# Altium PCB PCB.PcbDoc (part 3 of 3)
Units mm, origin at the board's own origin, x right, y up, seen from the top; angles counter-clockwise.
Board outline 68.53 x 53.3 mm, 2 copper layers (Top Layer, Bottom Layer); 60 components, 48 nets, 220 pads, 55 vias.
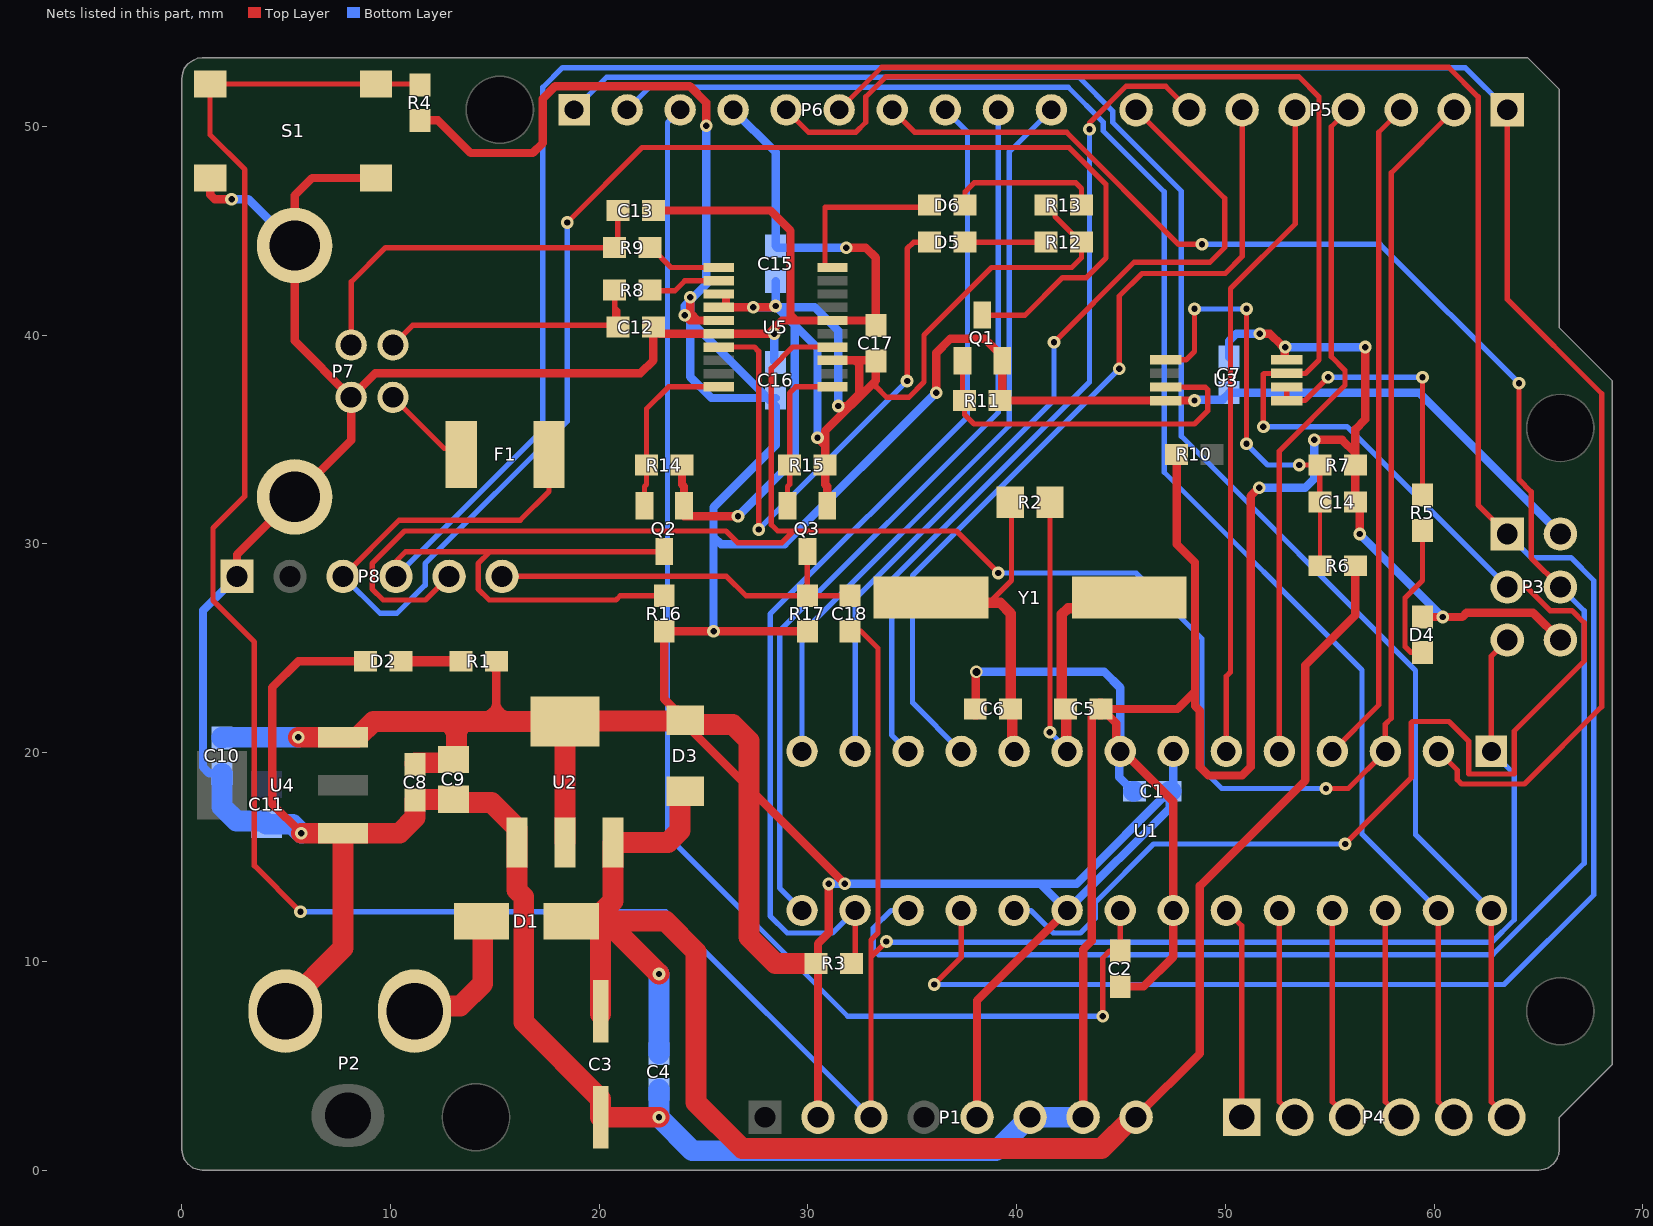
[diagram p2: the nets of this part, all layers, seen from the top]

## Via types
v1: diameter 0.61, hole 0.305, Top Layer to Bottom Layer, 54 vias
v2: diameter 0.61, hole 0.381, Top Layer to Bottom Layer, 1 vias

## Nets (pads, with @x,y where several pads share a name; then routed paths per layer and width w, separated by ;. In a path a pad name is that pad's centre, name@x,y a point inside that pad or via, vN(x,y) a via of type N, cw(c..) or ccw(c..) an arc to the next point about the centre after c; other vN are vias at no path point) (continued)
+3V3E: C15.2 C17.2 Q2.1 Q3.1 R12.2 R13.2 R14.1 R15.2 U5.3 U5.13 U5.14 | length 69.5
  Top Layer w0.254: 33.25,37.83 33.25,37.536 33.758,37.028 34.833,37.028 35.56,37.755 35.56,40.016 38.788,43.244 42.637,43.244 43.106,43.712 R12.2@43.106,44.461 43.056,44.461 41.829,45.688 41.829,45.866 41.508,46.186 R13.2@41.406,46.186
  Top Layer w0.4: R14.1@23.966,33.782 23.966,32.849 24.064,32.751 Q2.1@24.064,31.834 24.064,31.329 v1(26.646,31.329) ; U5.14@25.723,41.339 U5.14@26.073,41.339 ; U5.13@25.723,41.974 26.073,41.974 U5.14@26.073,41.339 ; v1(27.382,41.339) U5.14@26.073,41.339 ; v1@28.448,41.339 U5.14@26.073,41.339 ; v1(30.456,35.088) 30.822,34.722 ; U5.3@30.823,38.799 U5.3@31.173,38.799 ; Q3.1@30.922,31.834 30.922,32.751 30.822,32.851 R15.2@30.822,33.782 30.822,34.722 ; v1(31.446,36.612) 31.878,36.612 32.462,37.196 32.462,38.595 32.259,38.799 U5.3@31.173,38.799 ; 30.822,34.722 30.822,35.403 33.25,37.83 C17.2@33.25,38.774 33.225,38.799 U5.3@31.173,38.799
  Bottom Layer w0.4: v1(26.646,31.329) 29.363,34.047 29.363,40.487 ; v1(27.382,41.339) 30.327,41.339 31.446,40.219 v1(31.446,36.612) ; C15.2@28.448,42.584 v1(28.448,41.402) 29.18,40.67 29.363,40.487 ; v1(30.456,35.088) 30.456,39.394 29.363,40.487
+5VD: C1.1 C7.1 C8.2 C9.2 C10.2 C16.1 D3.2 P1.2 P1.5 P3.2 Q1.2 R1.1 R3.1 R4.1 R11.2 R16.1 R17.2 U1.7 U1.20 U2.2 U3.8 U4.3 U5.15 | length 254.6
  Top Layer w0.381: 14.14,21.756 ccw(c14.309,22.521) 15.074,22.352 ccw(c15.839,22.521) 16.008,21.756
  Top Layer w0.4: R4.1@11.408,50.297 12.275,50.297 13.844,48.728 16.816,48.728 17.298,49.21 17.298,51.337 17.89,51.928 24.343,51.928 25.122,51.149 v1(25.122,50.038) ; 13.983,21.423 14.346,21.423 14.346,21.55 14.14,21.756 ; 14.986,21.494 15.074,21.582 15.074,22.352 R1.1@15.074,24.384 ; D3.2@23.73,21.756 23.961,21.525 24.13,21.356 v1(31.759,13.727) ; v1(24.093,40.958) 24.347,40.704 U5.15@25.723,40.704 ; D3.2@24.13,21.556 23.114,22.572 R16.1@23.114,25.82 v1(25.477,25.82) R17.2@29.972,25.82 ; v1(24.36,41.819) 24.36,41.057 24.713,40.704 U5.15@25.723,40.704 ; U5.15@26.073,40.704 U5.15@25.723,40.704 ; P1.2@30.48,2.54 30.48,10.854 30.989,11.363 v1(30.989,13.716) ; v1(36.144,37.25) 36.144,39.159 36.813,39.828 38.479,39.828 39.304,39.003 Q1.2@39.304,38.778 39.304,36.973 R11.2@39.202,36.871 42.571,36.871 U3.8@47.138,36.871 v1(48.514,36.871) ; P1.5@38.1,2.54 38.1,8.128 U1.20@42.418,12.446
  Top Layer w0.508: 12.365,21.336 cw(c12.279,20.661) 12.954,20.574 ; 13.394,20.661 cw(c14.069,20.747) 13.983,21.423
  Top Layer w1: v1(5.588,20.745) U4.3@7.731,20.745 8.431,20.745 9.18,21.494 14.986,21.494 U2.2@18.365,21.494 ; C8.2@11.176,19.444 11.176,19.494 11.203,19.521 12.865,19.521 C9.2@13.015,19.671 13.165,19.821 13.165,21.082 ; R1.1@15.024,24.334 15.024,24.384 R1.1@15.074,24.384 ; U2.2@18.365,15.694 U2.2@18.365,21.494 ; D3.2@23.73,21.756 D3.2@23.961,21.525 ; D3.2@24.13,21.556 24.099,21.525 D3.2@23.961,21.525 ; R3.1@30.392,9.906 28.448,9.906 27.178,11.176 27.178,20.574 26.396,21.356 24.13,21.356 D3.2@23.961,21.525 ; U2.2@18.365,21.494 18.396,21.525 D3.2@23.961,21.525
  Bottom Layer w0.4: v1(24.36,41.819) 24.36,38.009 25.373,36.996 C16.1@28.448,36.996 ; v1(25.122,50.038) 25.122,42.431 24.093,41.402 v1(24.093,40.958) 24.133,40.917 28.251,36.799 28.448,36.603 28.448,34.731 25.477,31.76 25.477,30.342 ; v1(25.477,25.82) 25.477,30.342 ; v1(30.989,13.716) 41.148,13.716 U1.20@42.418,12.446 47.332,17.36 C1.1@47.332,18.156 ; v1(31.759,13.727) 42.876,13.727 47.498,18.348 U1.7@47.498,20.066 47.498,18.272 C1.1@47.382,18.156 ; v1(36.144,37.25) 28.883,29.989 25.83,29.989 25.477,30.342 ; v1(48.514,36.871) 48.554,36.911 49.865,36.911 50.165,37.211 C7.1@50.165,37.25 59.27,37.25 P3.2@66.04,30.48
  Bottom Layer w1: C10.2@1.93,20.713 1.93,20.745 v1(5.588,20.745) ; C1.1@47.332,18.156 C1.1@47.382,18.156
+VIN: C3.1 C4.2 D1.2 D3.1 P1.8 R6.1 U2.3 | length 93
  Top Layer w0.4: D1.2@18.66,11.938 20.066,11.938 C3.1@20.066,7.62 C3.1@20.066,7.491 ; P1.8@45.72,2.54 48.769,5.589 48.769,13.625 53.824,18.68 53.824,24.194 56.222,26.592 R6.1@56.222,28.956
  Top Layer w1: C3.1@20.066,7.491 C3.1@20.066,7.62 20.066,11.938 ; v1(22.86,9.398) 20.32,11.938 ; D3.1@24.13,18.156 24.076,18.156 23.876,17.956 23.876,16.28 23.29,15.694 U2.3@20.665,15.694 20.665,12.899 20.066,12.3 20.066,11.938 ; P1.8@45.72,2.54 45.558,2.54 44.058,1.04 26.85,1.04 24.638,3.252 24.638,10.468 23.168,11.938 20.32,11.938 ; 20.066,11.938 20.32,11.938
  Bottom Layer w1: C4.2@22.86,5.58 v1(22.86,9.398)
A0: P4.1 U1.23 | length 10.2
  Top Layer w0.254: U1.23@50.038,12.446 50.778,11.706 P4.1@50.778,2.54
A1: P4.2 U1.24 | length 10.2
  Top Layer w0.254: U1.24@52.578,12.446 52.578,3.28 P4.2@53.318,2.54
A2: P4.3 U1.25 | length 10.2
  Top Layer w0.254: U1.25@55.118,12.446 55.118,3.28 P4.3@55.858,2.54
A3: P4.4 U1.26 | length 10.2
  Top Layer w0.254: U1.26@57.658,12.446 57.658,3.28 P4.4@58.398,2.54
A4_SDA: P4.5 P6.2 U1.27 | length 78.6
  Top Layer w0.254: U1.27@60.198,12.446 60.198,3.28 P4.5@60.938,2.54
  Bottom Layer w0.254: P6.2@21.336,50.8 22.413,51.877 42.47,51.877 44.139,50.208 44.139,49.795 47.067,46.866 47.067,33.437 56.541,23.963 56.541,16.103 U1.27@60.198,12.446
A5_SCL: P4.6 P6.1 U1.28 | length 83.1
  Top Layer w0.254: U1.28@62.738,12.446 62.738,3.28 P4.6@63.478,2.54
  Bottom Layer w0.254: P6.1@18.796,50.8 20.356,52.36 42.978,52.36 44.593,50.745 44.593,50.201 47.88,46.914 47.88,35.164 59.107,23.937 59.107,16.077 U1.28@62.738,12.446
AREF: C2.1 P6.3 U1.21 | length 65.2
  Top Layer w0.254: v1(44.121,7.377) 44.121,10.171 44.452,10.502 C2.1@44.958,10.502 U1.21@44.958,12.446
  Bottom Layer w0.254: P6.3@23.876,50.8 23.267,50.191 23.267,16.013 31.903,7.377 v1(44.121,7.377)
D0_RX: P5.1 P8.4 Q2.3 R16.2 U1.2 | length 139.5
  Top Layer w0.254: P8.4@10.266,28.448 10.266,29.173 10.72,29.627 14.758,29.627 ; R16.2@23.114,27.52 21.007,27.52 20.802,27.316 14.733,27.316 14.2,27.849 14.2,29.068 14.758,29.627 ; Q2.3@23.114,29.634 23.114,29.627 14.758,29.627 ; U1.2@60.198,20.066 61.105,19.159 61.105,18.705 61.308,18.502 64.315,18.502 68.022,22.209 68.022,37.196 63.5,41.718 P5.1@63.5,50.8
  Bottom Layer w0.254: P8.4@10.266,28.448 17.298,35.48 17.298,51.877 18.238,52.817 61.483,52.817 P5.1@63.5,50.8
D1_TX: P5.2 P8.5 U1.3 U5.4 | length 108.9
  Top Layer w0.254: P8.5@12.806,28.448 11.674,27.316 9.653,27.316 9.12,27.849 9.12,29.068 10.669,30.618 26.068,30.618 26.623,30.062 28.757,30.062 29.313,30.618 ; U5.4@30.79,39.434 U5.4@30.823,39.434 ; U5.4@31.173,39.434 U5.4@30.823,39.434 ; v1(39.117,28.611) 37.11,30.618 29.313,30.618 ; v1(54.814,18.288) 55.88,18.288 U1.3@57.658,20.066 57.658,21.372 57.938,21.652 57.938,47.778 P5.2@60.96,50.8 ; 29.313,30.618 28.549,30.618 28.245,30.922 28.245,38.415 29.264,39.434 U5.4@30.823,39.434
  Bottom Layer w0.254: v1(39.117,28.611) 45.721,28.611 48.871,25.461 48.871,19.238 49.821,18.288 v1(54.814,18.288)
D2: P5.3 U1.4 | length 32.1
  Top Layer w0.254: U1.4@55.118,20.066 57.341,22.289 57.341,49.721 P5.3@58.42,50.8
D3: P5.4 U1.5 | length 32.6
  Top Layer w0.254: U1.5@52.578,20.066 52.578,34.455 55.725,37.603 55.725,38.317 55.068,38.974 55.068,49.988 P5.4@55.88,50.8
D4: P5.5 U1.6 | length 32.1
  Top Layer w0.254: U1.6@50.038,20.066 50.038,23.658 50.242,23.862 50.242,42.238 53.34,45.336 P5.5@53.34,50.8
D5: P5.6 U1.11 | length 40.6
  Top Layer w0.254: v1(44.908,38.391) 44.908,41.87 46,42.962 49.989,42.962 50.8,43.773 P5.6@50.8,50.8
  Bottom Layer w0.254: U1.11@37.338,20.066 35.002,22.402 35.002,28.485 v1(44.908,38.391)
D6: P5.7 U1.12 | length 40.3
  Top Layer w0.254: v1(43.486,49.871) 43.486,50.176 45.238,51.928 47.132,51.928 P5.7@48.26,50.8
  Bottom Layer w0.254: U1.12@34.798,20.066 34.008,20.856 34.008,28.277 43.486,37.755 v1(43.486,49.871)
D7: P5.8 U1.13 | length 42
  Top Layer w0.254: v1(41.784,39.66) 45.619,43.495 49.252,43.495 49.963,44.207 49.963,46.557 P5.8@45.72,50.8
  Bottom Layer w0.254: U1.13@32.258,20.066 32.258,27.365 41.784,36.891 v1(41.784,39.66)
D8: P6.10 U1.14 | length 35.7
  Bottom Layer w0.254: U1.14@29.718,20.066 29.718,25.743 39.64,35.665 39.64,48.784 P6.10@41.656,50.8
D9: P6.9 U1.15 | length 43.1
  Bottom Layer w0.254: U1.15@29.718,12.446 28.641,13.523 28.641,25.828 39.116,36.303 P6.9@39.116,50.8
D10_SS: P6.8 R3.2 U1.16 | length 50.4
  Top Layer w0.254: R3.2@32.092,9.906 32.258,10.072 U1.16@32.258,12.446
  Bottom Layer w0.254: U1.16@32.258,12.446 31.176,11.364 29.008,11.364 28.187,12.185 28.187,26.641 37.637,36.092 37.637,49.739 P6.8@36.576,50.8
D11_MOSI: P3.4 P6.7 U1.17 | length 98.8
  Top Layer w0.254: P6.7@34.036,50.8 35.118,49.718 42.395,49.718 47.758,44.356 v1(48.874,44.356) ; v1(64.06,37.704) 64.06,33.081 64.644,32.497 64.644,29.336 P3.4@66.04,27.94
  Bottom Layer w0.254: U1.17@34.798,12.446 33.976,12.446 33.123,11.593 33.123,10.577 33.377,10.323 62.797,10.323 67.184,14.71 67.184,26.796 P3.4@66.04,27.94 ; v1(48.874,44.356) 57.408,44.356 v1(64.06,37.704)
D12_MISO: P3.1 P6.6 U1.18 | length 111.1
  Top Layer w0.254: P6.6@31.496,50.8 33.532,52.836 60.688,52.836 62.104,51.42 62.104,31.876 P3.1@63.5,30.48 ; v1(36.044,8.901) 37.338,10.195 U1.18@37.338,12.446
  Bottom Layer w0.254: v1(36.044,8.901) 63.349,8.901 67.641,13.193 67.641,28.255 66.549,29.348 64.632,29.348 P3.1@63.5,30.48
D13_SCK: P3.3 P6.5 U1.19 U3.3 | length 106.7
  Top Layer w0.254: P6.5@28.956,50.8 30.038,49.718 32.284,49.718 32.767,50.201 32.767,51.42 33.729,52.382 53.522,52.382 54.484,51.42 54.484,38.822 53.833,38.171 U3.3@52.938,38.171 51.842,38.171 51.816,38.145 v1(51.816,35.619) ; v1(55.729,15.632) 58.904,18.807 58.904,21.448 58.954,21.499 60.707,21.499 61.647,20.559 61.647,18.984 63.831,18.984 63.831,21.042 67.184,24.395 67.184,26.223 66.6,26.808 65.548,26.808 64.416,27.94 P3.3@63.5,27.94
  Bottom Layer w0.254: U1.19@39.878,12.446 40.677,12.446 41.754,11.369 43.059,11.369 43.765,12.076 43.765,12.838 46.559,15.632 v1(55.729,15.632) ; v1(51.816,35.619) 55.821,35.619 P3.3@63.5,27.94
DTR: C18.1 P8.6 Q3.3 R17.1 | length 19.2
  Top Layer w0.254: P8.6@15.346,28.448 26.099,28.448 27.027,27.52 R17.1@29.972,27.52 ; Q3.3@29.972,29.634 R17.1@29.972,27.52 ; C18.1@32.004,27.52 30.964,27.52 R17.1@29.972,27.52
GND: C1.2 C2.2 C3.2 C4.1 C5.2 C6.2 C7.2 C8.1 C9.1 C10.1 C11.1 C12.2 C13.2 C14.1 C15.1 C16.2 C17.1 D2.2 D4.2 P1.6 P1.7 P2.2 P3.6 P6.4 P7.4 P7.5 P7.6 P8.1 R7.2 R10.2 S1.1 U1.8 U1.22 U2.1 U3.4 U4.1 U5.6 U5.16 | length 305.7
  Top Layer w0.4: S1.1@1.359,47.534 1.359,46.735 1.576,46.518 v1(2.389,46.518) ; P8.1@2.646,28.448 2.646,29.496 P7.6@5.408,32.258 8.118,34.968 P7.4@8.118,37.028 ; v1(5.731,16.145) 4.331,17.544 4.331,23.127 5.588,24.384 D2.2@8.802,24.384 ; S1.1@9.309,47.534 6.249,47.534 5.408,46.692 P7.5@5.408,44.298 5.408,39.738 P7.4@8.118,37.028 ; C13.2@22.589,45.974 28.195,45.974 29.16,45.009 29.16,40.958 29.414,40.704 ; v1(28.385,40.069) v1@28.119,40.069 ; v1(31.828,44.196) 32.766,44.196 33.25,43.712 33.25,40.894 C17.1@33.059,40.704 ; C17.1@33.25,40.474 33.25,40.704 C17.1@33.059,40.704 ; C6.2@38.012,22.098 38.037,22.123 38.037,23.851 v2(38.062,23.876) ; P1.7@43.18,2.54 43.18,10.577 43.587,10.984 43.587,21.705 C5.2@43.98,22.098 ; C5.2@44.03,22.098 C5.2@44.08,22.098 ; C2.2@44.958,8.802 46.077,8.802 47.498,10.223 U1.22@47.498,12.446 47.498,17.661 U1.8@44.958,20.201 ; U1.8@44.958,20.066 44.762,20.262 44.762,21.416 C5.2@44.08,22.098 ; R10.2@47.664,34.29 47.664,29.995 48.54,29.119 48.54,22.936 ; v1(51.614,32.7) 51.207,32.294 51.207,19.315 50.801,18.908 49.175,18.908 48.769,19.315 48.769,22.007 48.54,22.236 48.54,22.936 ; v1(51.637,40.069) 52.133,40.069 52.674,39.528 52.815,39.387 52.832,39.37 52.832,38.846 52.857,38.821 U3.4@52.938,38.821 ; v1(54.255,34.986) 55.587,34.986 56.222,34.351 ; v1(56.426,30.48) 56.426,31.8 C14.1@56.222,32.004 56.211,32.004 56.211,33.782 R7.2@56.222,33.782 56.222,34.351 ; v1(56.694,39.431) 56.694,35.966 56.222,35.494 56.222,34.351 ; D4.2@59.436,26.504 v1(60.402,26.504) 61.343,26.504 61.545,26.706 64.734,26.706 P3.6@66.04,25.4 ; P7.4@8.118,37.028 9.276,38.187 21.98,38.187 22.589,38.796 C12.2@22.589,40.386 22.907,40.069 U5.16@25.723,40.069 v1@28.119,40.069 ; v1@28.119,40.069 28.754,40.704 29.414,40.704 ; 29.414,40.704 U5.6@31.173,40.704 C17.1@33.059,40.704 ; C5.2@44.08,22.098 47.702,22.098 48.54,22.936
  Top Layer w1: P2.2@4.96,7.62 4.96,7.87 7.731,10.641 U4.1@7.731,16.145 ; v1(5.731,16.145) U4.1@7.731,16.145 ; v1(22.86,2.54) C3.2@20.066,2.54 20.066,3.415 16.385,7.096 16.385,13.103 16.065,13.423 U2.1@16.065,15.694 16.065,16.394 14.838,17.621 13.165,17.621 C9.1@13.015,17.771 13.002,17.758 11.176,17.758 C8.1@11.176,17.744 11.176,16.894 10.427,16.145 U4.1@7.731,16.145 ; C6.2@38.012,22.098 C6.2@38.062,22.098 ; C5.2@43.98,22.098 C5.2@44.03,22.098 ; U1.8@44.958,20.066 U1.8@44.958,20.201
  Bottom Layer w0.4: C10.1@1.93,19.013 1.319,19.013 1.017,19.315 1.017,26.819 P8.1@2.646,28.448 ; v1(2.389,46.518) 3.188,46.518 P7.5@5.408,44.298 ; P6.4@26.416,50.8 28.448,48.768 C15.1@28.448,44.284 28.536,44.196 v1(31.828,44.196) ; v1(28.385,40.069) 28.385,38.76 C16.2@28.448,38.696 ; v2(38.062,23.876) 44.196,23.876 44.958,23.114 U1.8@44.958,20.066 44.908,20.016 44.908,18.83 C1.2@45.582,18.156 ; C7.2@50.165,38.95 50.165,39.721 50.512,40.069 v1(51.637,40.069) ; v1(51.614,32.7) 53.824,32.7 54.255,33.132 v1(54.255,34.986) ; v1(52.858,39.431) v1(56.694,39.431) ; v1(56.426,30.48) v1(60.402,26.504)
  Bottom Layer w1: C10.1@1.93,19.013 1.93,17.413 2.618,16.726 3.914,16.726 C11.1@4.064,16.576 5.3,16.576 v1(5.731,16.145) ; C4.1@22.86,3.88 v1(22.86,2.54) 24.469,0.931 38.996,0.931 40.605,2.54 P1.6@40.64,2.54 P1.7@43.18,2.54 ; C1.2@45.582,18.156 C1.2@45.632,18.156
NetC5_1: C5.1 R2.2 U1.9 Y1.1 | length 22.5
  Top Layer w0.254: v1(41.59,20.983) R2.2@41.59,32.004
  Top Layer w0.5: U1.9@42.418,20.066 42.374,20.11 42.374,22.054 C5.1@42.33,22.098 42.164,22.264 42.164,26.631 42.457,26.924 44.882,26.924 Y1.1@45.39,27.432
  Bottom Layer w0.254: v1(41.59,20.983) U1.9@42.418,20.155
  Bottom Layer w0.5: U1.9@42.418,20.066 U1.9@42.418,20.155
NetC6_1: C6.1 R2.1 U1.10 Y1.2 | length 16.1
  Top Layer w0.254: Y1.2@35.89,27.432 36.144,27.178 38.675,27.178 39.752,28.255 39.752,31.913 39.69,31.913 R2.1@39.69,32.004
  Top Layer w0.5: 38.675,27.178 39.204,27.178 39.712,26.67 C6.1@39.712,22.098 39.795,22.015 39.795,20.149 U1.10@39.878,20.066
NetC12_1: C12.1 P7.2 R8.2 | length 14
  Top Layer w0.254: P7.2@10.118,39.528 11.064,40.474 20.801,40.474 20.74,40.535 20.74,41.333 ; R8.2@20.74,42.164 20.74,41.333 ; C12.1@20.889,40.386 20.889,41.184 20.74,41.333
  Top Layer w0.5: P7.2@10.118,39.528 P7.2@10.347,39.528
NetC13_1: C13.1 P7.3 R9.2 | length 18.2
  Top Layer w0.254: P7.3@8.118,39.528 8.128,39.538 8.128,42.564 9.76,44.196 R9.2@20.74,44.196 20.889,44.345 C13.1@20.889,45.974
NetC14_2: C14.2 R6.2 R7.1 U3.5 | length 21.3
  Top Layer w0.2: R6.2@54.522,28.956 C14.2@54.522,32.004
  Top Layer w0.254: U3.5@47.138,38.821 48.109,38.821 48.515,39.227 v1(48.515,41.26) ; v1(51.004,34.798) v1(51.004,41.26) ; v1(53.534,33.782) R7.1@54.509,33.782 ; C14.2@54.522,32.004 54.509,32.004 R7.1@54.509,33.782 ; R7.1@54.522,33.782 R7.1@54.509,33.782
  Bottom Layer w0.254: v1(48.515,41.26) v1(51.004,41.26) ; v1(51.004,34.798) 52.02,33.782 v1(53.534,33.782)
NetD1_1: D1.1 P2.1 | length 8
  Top Layer w1: P2.1@11.587,7.62 P2.1@11.16,7.62 11.16,7.87 13.342,7.87 14.423,8.951 14.423,11.425 14.135,11.713 13.91,11.938 D1.1@14.36,11.938
NetD2_1: D2.1 R1.2 | length 2.9
  Top Layer w0.5: D2.1@10.502,24.384 R1.2@13.374,24.384
NetD4_1: D4.1 R5.2 | length 6.9
  Top Layer w0.254: D4.1@59.436,24.804 58.878,24.804 58.599,25.083 58.599,27.418 59.436,28.255 R5.2@59.436,30.646
NetD5_1: D5.1 R12.1 | length 3.9
  Top Layer w0.254: D5.1@37.518,44.461 R12.1@41.406,44.461
NetD5_2: D5.2 U5.17 | length 28.1
  Top Layer w0.254: U5.17@25.723,39.434 26.073,39.434 27.431,39.434 27.636,39.228 v1(27.636,30.694) ; v1(34.748,37.806) 34.748,44.146 35.052,44.45 35.807,44.45 D5.2@35.818,44.461
  Bottom Layer w0.254: v1(27.636,30.694) v1(34.748,37.806)
NetD6_1: D6.1 R13.1 | length 7.3
  Top Layer w0.254: D6.1@37.518,46.239 37.518,46.868 37.949,47.299 42.832,47.299 43.106,47.025 R13.1@43.106,46.239
NetD6_2: D6.2 U5.10 | length 8.4
  Top Layer w0.254: U5.10@31.173,43.244 30.823,43.244 30.811,43.244 30.811,46.137 35.818,46.137 D6.2@35.818,46.239
NetF1_1: F1.1 P7.1 | length 4.6
  Top Layer w0.254: P7.1@10.118,37.028 12.574,34.572 13.394,34.572 F1.1@13.394,34.29
NetQ1_1: Q1.1 R11.1 U3.7 | length 17.8
  Top Layer w0.254: Q1.1@37.404,38.778 37.404,36.871 R11.1@37.502,36.871 37.502,36.195 37.949,35.748 48.515,35.748 49.146,36.379 49.146,37.395 49.035,37.506 48.048,37.506 48.032,37.521 U3.7@47.138,37.521
NetQ2_2: Q2.2 R14.2 U5.20 | length 8.9
  Top Layer w0.254: Q2.2@22.164,31.834 22.164,32.751 22.266,32.853 R14.2@22.266,33.782 22.266,36.477 23.318,37.529 U5.20@25.723,37.529 U5.20@26.073,37.529
NetQ3_2: Q3.2 R15.1 U5.1 | length 7.6
  Top Layer w0.254: Q3.2@29.022,31.834 29.022,32.751 29.122,32.851 R15.1@29.122,33.782 29.122,37.236 29.414,37.529 U5.1@30.823,37.529 ; U5.1@30.79,37.529 U5.1@30.823,37.529 ; U5.1@31.173,37.529 U5.1@30.823,37.529
NetR5_1: R5.1 U3.1 U3.2 | length 13.2
  Top Layer w0.254: U3.2@52.938,37.521 U3.1@52.938,36.871 53.803,36.871 v1(54.916,37.984) ; R5.1@59.436,32.346 v1(59.436,37.984)
  Bottom Layer w0.254: v1(54.916,37.984) v1(59.436,37.984)
NetR8_1: R8.1 U5.12 | length 3.8
  Top Layer w0.254: R8.1@22.44,42.164 22.474,42.13 23.622,42.13 24.1,42.609 U5.12@25.723,42.609 U5.12@26.073,42.609
NetR9_1: R9.1 U5.11 | length 4
  Top Layer w0.254: R9.1@22.44,44.196 22.49,44.196 23.443,43.244 U5.11@25.723,43.244 U5.11@26.073,43.244
R\S\T\: C18.2 P1.3 P3.5 R4.2 S1.2 U1.1 | length 154.2
  Top Layer w0.254: v1(5.691,12.38) 3.481,14.59 3.481,25.309 1.5,27.29 1.5,30.77 3.022,32.292 3.022,47.942 1.359,49.605 S1.2@1.359,52.034 5.334,52.034 S1.2@9.309,52.034 11.371,52.034 R4.2@11.408,51.997 ; C18.2@32.004,25.82 32.536,25.82 33.351,25.004 33.351,11.364 33.02,11.033 33.02,10.22 ; P1.3@33.02,2.54 33.02,10.22 ; v1(33.758,10.958) 33.02,10.22 ; U1.1@62.738,20.066 62.738,24.638 P3.5@63.5,25.4
  Bottom Layer w0.254: v1(5.691,12.38) 23.18,12.38 P1.3@33.02,2.54 ; v1(33.758,10.958) 33.801,10.915 62.747,10.915 63.831,11.999 63.831,18.973 U1.1@62.738,20.066
USB+: F1.2 P8.3 Q1.3 | length 77.4
  Top Layer w0.254: P8.3@7.726,28.448 10.422,31.144 16.215,31.144 17.594,32.523 F1.2@17.594,34.29 ; v1(18.467,45.4) 22.058,48.991 42.511,48.991 44.273,47.23 44.273,43.699 43.333,42.759 42.191,42.759 40.387,40.955 38.354,40.955 Q1.3@38.354,40.978
  Bottom Layer w0.254: P8.3@7.726,28.448 9.493,26.681 10.313,26.681 11.66,28.027 11.66,29.068 18.467,35.875 v1(18.467,45.4)
pads on no net: P1.1 P2.3 P8.2 U4.4 U5.2 U5.5 U5.7 U5.8 U5.9 U5.18 U5.19

## Polygon pours and split planes (outlines as drawn)
no net on Top Layer (solid, pour order 0): 43.106,44.486

## Other copper
Top Layer:
  region net NetC12_1: 10.347,39.528
Bottom Layer:
  region: 9.309,52.034

## Silkscreen, mask and mechanical layers (free items; w line width, h text height)
Top Overlay:
  text "SLC" at 18.365,49.111 h0.6 r270
  text "SDA" at 21.336,49.111 h0.6 r270
  text "AREF" at 23.622,49.111 h0.6 r270
  text "GND" at 26.162,49.111 h0.6 r270
  text "SCK" at 28.702,49.111 h0.6 r270
  text "MISO" at 31.173,49.111 h0.6 r270
  text "MOSI" at 33.782,49.111 h0.6 r270
  text "SS" at 36.373,49.111 h0.6 r270
  text "D9" at 38.965,49.111 h0.6 r270
  text "D8" at 41.402,49.111 h0.6 r270
  text "D7" at 45.238,49.111 h0.6 r270
  text "D6" at 47.811,49.111 h0.6 r270
  text "D5" at 50.383,49.111 h0.6 r270
  text "D4" at 52.956,49.111 h0.6 r270
  text "D3" at 55.528,49.111 h0.6 r270
  text "D2" at 58.101,49.111 h0.6 r270
  text "TX" at 60.673,49.111 h0.6 r270
  text "RX" at 63.246,49.111 h0.6 r270
  text "Compatible" at 53.518,46.228 h0.8
  text "TX" at 33.024,45.72 h0.8
  text "RX" at 33.024,44.196 h0.8
  text "REV3" at 58.42,43.849 h0.6
  text "UNO" at 53.318,43.712 h2
  text "Desinged by Rubem Pacelli" at 53.318,40.448 h0.8
  text "+5VD" at 7.952,25.309 h0.8
  text "+3V3D" at 35.31,7.057 h0.6 r270
  text "+5VD" at 30.23,6.457 h0.6 r270
  text "+5VD" at 37.85,6.457 h0.6 r270
  text "+VIN" at 45.394,6.357 h0.6 r270
  text "SDA" at 60.706,6.096 h0.6 r270
  text "SCL" at 63.228,6.096 h0.6 r270
  text "RST" at 32.77,5.857 h0.6 r270
  text "GND" at 40.609,5.857 h0.6 r270
  text "GND" at 42.88,5.857 h0.6 r270
  text "A0" at 50.546,5.496 h0.6 r270
  text "A2" at 55.858,5.496 h0.6 r270
  text "A3" at 58.166,5.496 h0.6 r270
  text "A1" at 53.318,5.296 h0.6 r270
Mechanical 1:
  region: 18.66,11.938
Mechanical 2:
  drawing of 724 lines, arcs and shapes, not listed
Mechanical 3:
  the board outline again, w0.013
Mechanical 4:
  circle w0.006: c0,5.078 r0.003
  circle w0.006: c68.535,5.078 r0.003
  circle w0.006: c0.994,0 r0.003
  circle w0.006: c0.994,53.3 r0.003
Mechanical 15:
  the board outline again, w0.508
Drill Drawing:
  drawing of 273 lines, arcs and shapes, not listed
  text "Layer" at 88.328,81.216 h1.52
  text "Name" at 98.74,81.216 h1.52
  text "Material" at 122.356,81.216 h1.52
  text "Thickness" at 144.194,81.216 h1.52
  text "Constant" at 160.7,81.216 h1.52
  text "Board Layer Stack" at 175.174,81.216 h1.52
  text "1" at 88.328,78.168 h1.52
  text "Top Overlay" at 98.74,78.168 h1.52
  text "2" at 88.328,75.12 h1.52
  text "Top Solder" at 98.74,75.12 h1.52
  text "Solder Resist" at 122.356,75.12 h1.52
  text "0,40mil" at 144.194,75.12 h1.52
  text "3,5" at 160.7,75.12 h1.52
  text "3" at 88.328,72.072 h1.52
  text "Top Layer" at 98.74,72.072 h1.52
  text "Copper" at 122.356,72.072 h1.52
  text "1,40mil" at 144.194,72.072 h1.52
  text "4" at 88.328,69.025 h1.52
  text "Dielectric 1" at 98.74,69.025 h1.52
  text "FR-4" at 122.356,69.025 h1.52
  text "12,60mil" at 144.194,69.025 h1.52
  text "4,8" at 160.7,69.025 h1.52
  text "5" at 88.328,65.977 h1.52
  text "Bottom Layer" at 98.74,65.977 h1.52
  text "Copper" at 122.356,65.977 h1.52
  text "1,40mil" at 144.194,65.977 h1.52
  text "6" at 88.328,62.928 h1.52
  text "Bottom Solder" at 98.74,62.928 h1.52
  text "Solder Resist" at 122.356,62.928 h1.52
  text "0,40mil" at 144.194,62.928 h1.52
  text "3,5" at 160.7,62.928 h1.52
  text "7" at 88.328,59.88 h1.52
  text "Bottom Overlay" at 98.74,59.88 h1.52
  text "Symbol" at 88.837,52.387 h1.83
  text "Count" at 101.686,52.387 h1.83
  text "Hole Size" at 116.668,52.387 h1.83
  text "Plated" at 146.377,52.387 h1.83
  text "Hole Type" at 159.226,52.387 h1.83
  text "Drill Layer Pair" at 177.865,52.387 h1.83
  text "Via/Pad" at 215.953,52.387 h1.83
  text "Pad Shape" at 230.936,52.387 h1.83
  text "Template" at 249.879,52.387 h1.83
  text "54" at 101.686,48.578 h1.52
  text "12,00mil (0,305mm)" at 116.668,48.578 h1.52
  text "PTH" at 146.377,48.578 h1.52
  text "Round" at 159.226,48.578 h1.52
  text "Top Layer - Bottom Layer" at 177.865,48.578 h1.52
  text "Via" at 215.953,48.578 h1.52
  text "Rounded" at 230.936,48.578 h1.52
  text "v61h30" at 249.879,48.578 h1.52
  text "1" at 101.686,44.767 h1.52
  text "15,00mil (0,381mm)" at 116.668,44.767 h1.52
  text "PTH" at 146.377,44.767 h1.52
  text "Round" at 159.226,44.767 h1.52
  text "Top Layer - Bottom Layer" at 177.865,44.767 h1.52
  text "Via" at 215.953,44.767 h1.52
  text "Rounded" at 230.936,44.767 h1.52
  text "v61h38" at 249.879,44.767 h1.52
  text "38" at 101.686,40.957 h1.52
  text "35,43mil (0,900mm)" at 116.668,40.957 h1.52
  text "PTH" at 146.377,40.957 h1.52
  text "Round" at 159.226,40.957 h1.52
  text "Top Layer - Bottom Layer" at 177.865,40.957 h1.52
  text "Pad" at 215.953,40.957 h1.52
  text "(Mixed)" at 230.936,40.957 h1.52
  text "(Mixed)" at 249.879,40.957 h1.52
  text "32" at 101.686,37.148 h1.52
  text "39,37mil (1,000mm)" at 116.668,37.148 h1.52
  text "PTH" at 146.377,37.148 h1.52
  text "Round" at 159.226,37.148 h1.52
  text "Top Layer - Bottom Layer" at 177.865,37.148 h1.52
  text "Pad" at 215.953,37.148 h1.52
  text "(Mixed)" at 230.936,37.148 h1.52
  text "(Mixed)" at 249.879,37.148 h1.52
  text "6" at 101.686,33.337 h1.52
  text "47,24mil (1,200mm)" at 116.668,33.337 h1.52
  text "PTH" at 146.377,33.337 h1.52
  text "Round" at 159.226,33.337 h1.52
  text "Top Layer - Bottom Layer" at 177.865,33.337 h1.52
  text "Pad" at 215.953,33.337 h1.52
  text "Rounded" at 230.936,33.337 h1.52
  text "(Mixed)" at 249.879,33.337 h1.52
  text "1" at 101.686,29.527 h1.52
  text "86,61mil (2,200mm)" at 116.668,29.527 h1.52
  text "PTH" at 146.377,29.527 h1.52
  text "Round" at 159.226,29.527 h1.52
  text "Top Layer - Bottom Layer" at 177.865,29.527 h1.52
  text "Pad" at 215.953,29.527 h1.52
  text "Rounded" at 230.936,29.527 h1.52
  text "r350_300h220r100" at 249.879,29.527 h1.52
  text "2" at 101.686,25.717 h1.52
  text "94,88mil (2,410mm)" at 116.668,25.717 h1.52
  text "PTH" at 146.377,25.717 h1.52
  text "Round" at 159.226,25.717 h1.52
  text "Top Layer - Bottom Layer" at 177.865,25.717 h1.52
  text "Pad" at 215.953,25.717 h1.52
  text "Rounded" at 230.936,25.717 h1.52
  text "c362h241" at 249.879,25.717 h1.52
  text "2" at 101.686,21.907 h1.52
  text "106,30mil (2,700mm)" at 116.668,21.907 h1.52
  text "PTH" at 146.377,21.907 h1.52
  text "Round" at 159.226,21.907 h1.52
  text "Top Layer - Bottom Layer" at 177.865,21.907 h1.52
  text "Pad" at 215.953,21.907 h1.52
  text "Rounded" at 230.936,21.907 h1.52
  text "r350_400h270r100" at 249.879,21.907 h1.52
  text "4" at 101.686,18.098 h1.52
  text "124,02mil (3,150mm)" at 116.668,18.098 h1.52
  text "PTH" at 146.377,18.098 h1.52
  text "Round" at 159.226,18.098 h1.52
  text "Top Layer - Bottom Layer" at 177.865,18.098 h1.52
  text "Pad" at 215.953,18.098 h1.52
  text "Rounded" at 230.936,18.098 h1.52
  text "c330h315" at 249.879,18.098 h1.52
  text "140 Total" at 101.686,14.287 h1.52

## Dimensions
0,0 to 68.535,5.078 on Drill Drawing

## Text inside footprints (layer, text, board x,y; h text height)
P1: Top Overlay "1" at 25.4,1.905 h1
P3: Top Overlay "2" at 65.532,33.02 h1 r270; Top Overlay "1" at 62.992,32.766 h1 r270
P4: Top Overlay "1" at 48.092,2.04 h1
P5: Top Overlay "1" at 64.712,48.006 h1
P6: Top Overlay "1" at 17.526,47.864 h1
P8: Top Overlay "1" at 0.36,27.94 h1